# Altium PCB Control Access.PcbDoc
Units mil, origin at the board's own origin, x right, y up, seen from the top; angles counter-clockwise.
Board outline 3210.35 x 3265 mil, 2 copper layers (Top Layer, Bottom Layer); 90 components, 163 nets, 400 pads, 56 vias.
Unrouted connection lines stored in the file: 2.
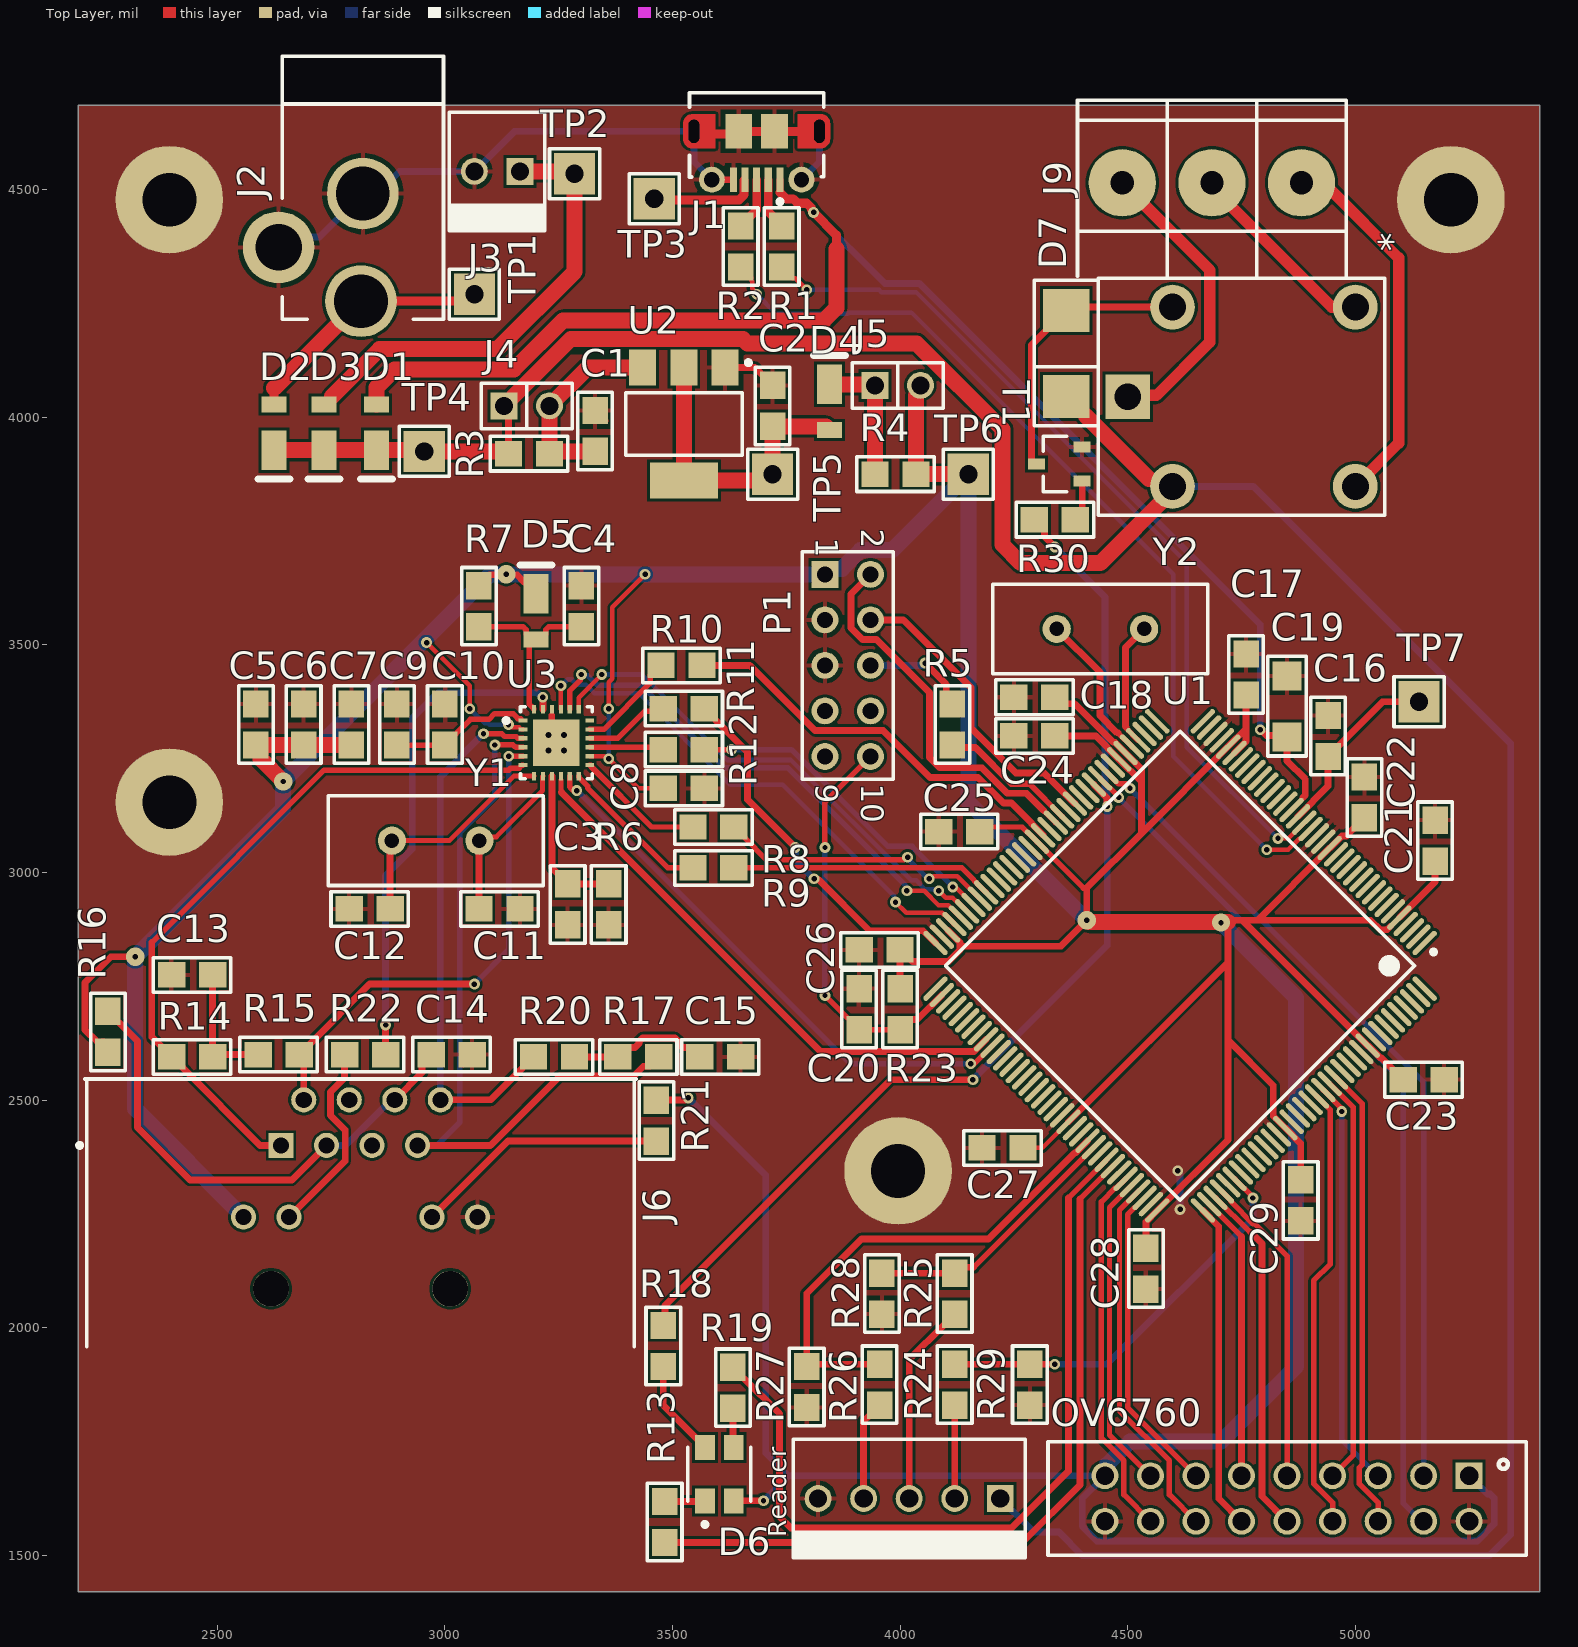
[diagram p0: Top Layer view]
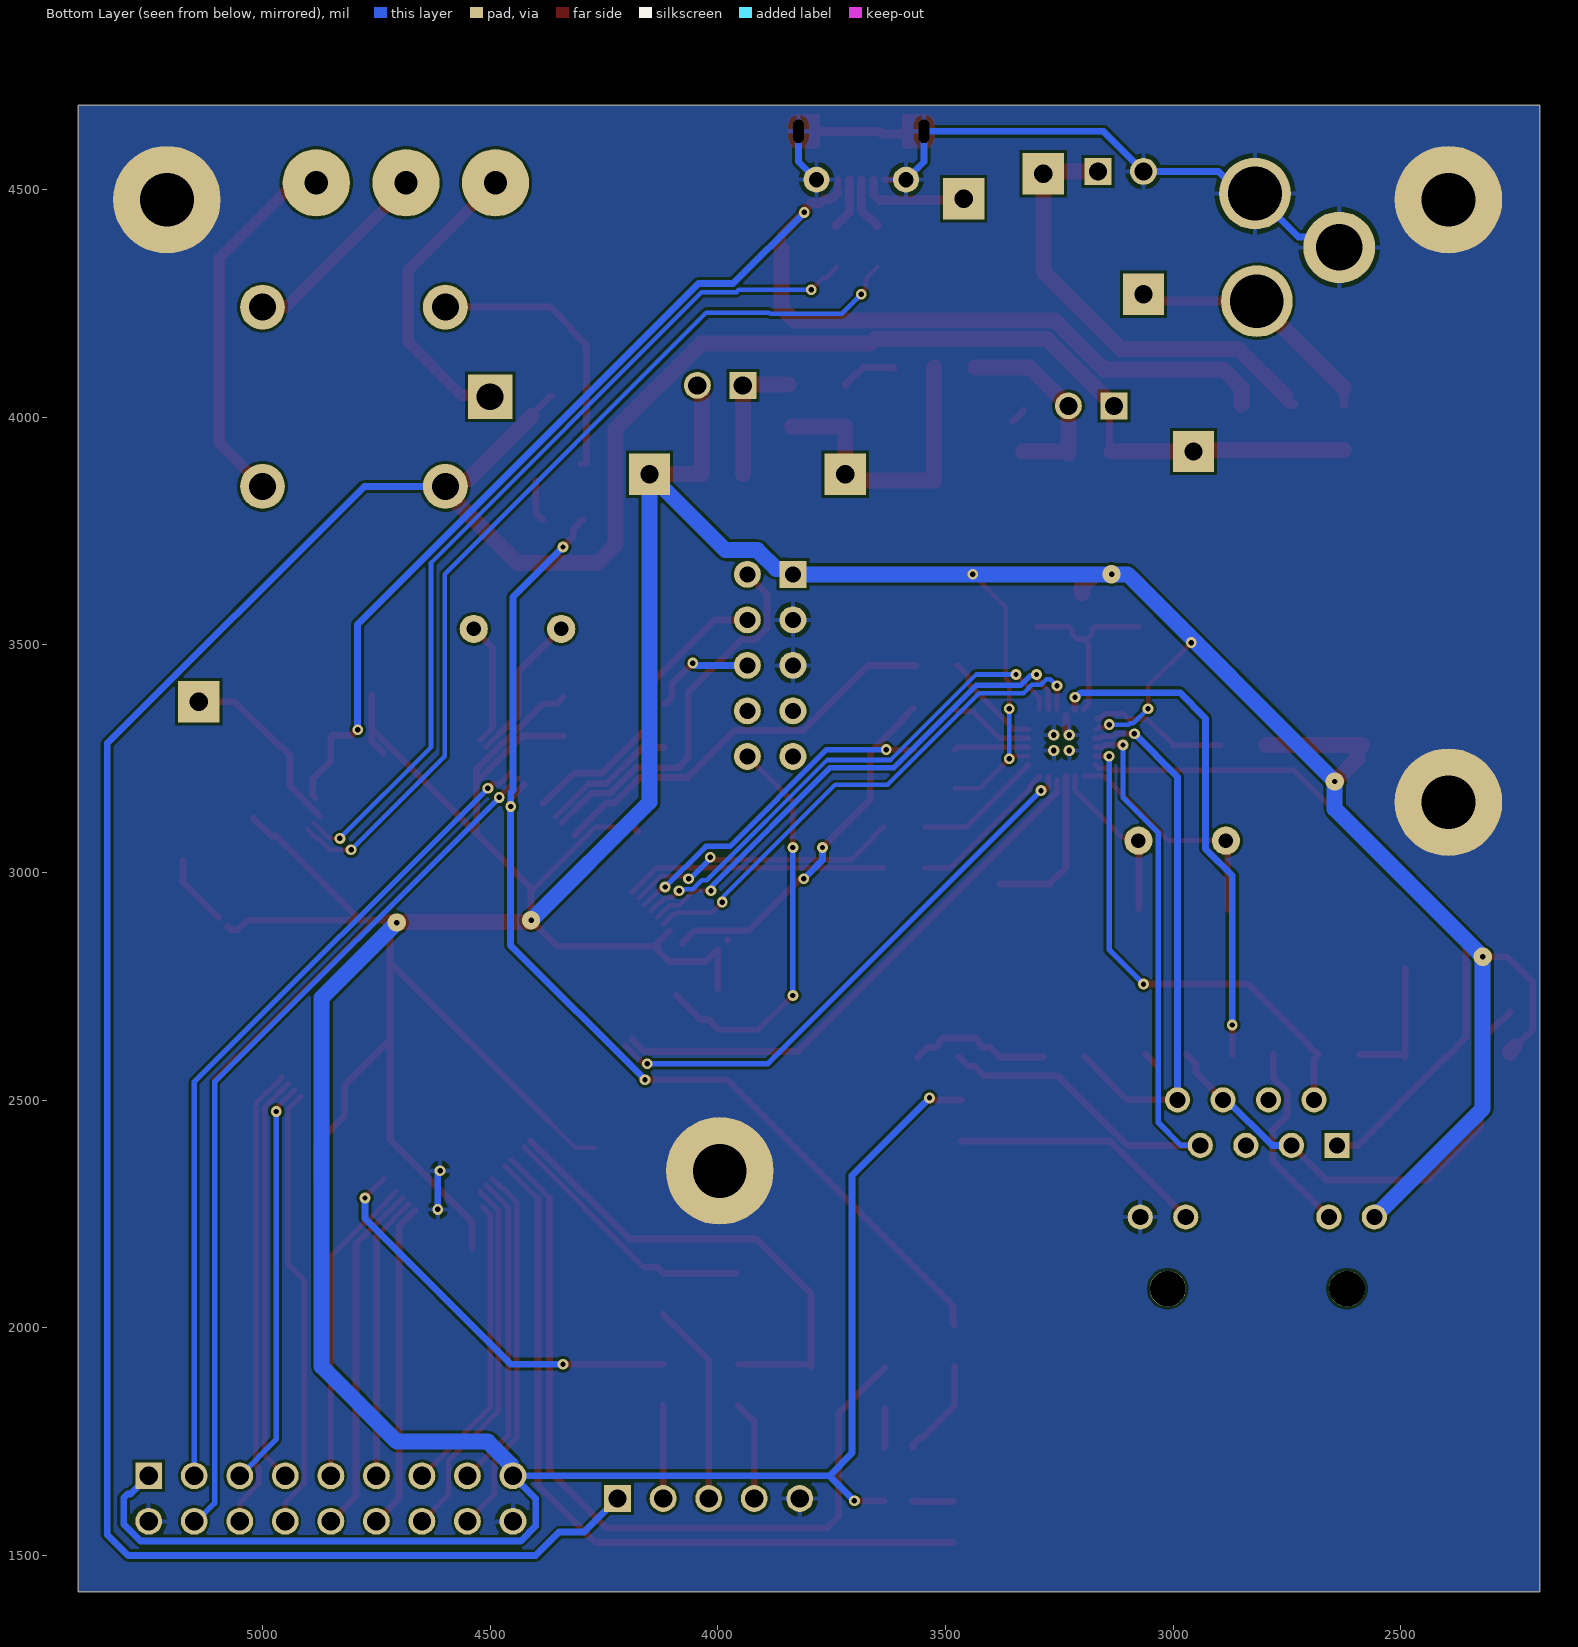
[diagram p1: Bottom Layer view, seen from below]

## Layer stack, top to bottom
Top Solder: solder mask 0.4, Solder Resist, Dk 3.5
Top Layer: signal copper 1.4
Dielectric 1: dielectric 12.6, FR-4, Dk 4.8
Bottom Layer: signal copper 1.4
Bottom Solder: solder mask 0.4, Solder Resist, Dk 3.5

## Board outline
2194.65,1420 5405,1420 5405,4685 2194.65,4685

## Design rules (kind name [scope] priority, off if disabled: settings)
Clearance [All] p1: gap=6 ignorepadtopadclearanceinfootprint=FALSE except(0: Arc-Hole Track-Hole SMDPad-Hole THPad-Hole Via-Hole Fill-Hole Poly-Hole Region-Hole Text-Hole)
HoleSize [All] p1: absolutevalues=TRUE maxlimit=1000 minlimit=3.94 maxpercent=80.000 minpercent=20.000
PolygonConnect [All] p1: connectstyle=Relief reliefconductorwidth=10 reliefentries=4 polygonreliefangle="90 Angle" airgapwidth=10
RoutingVias [All] p1: holewidth=11.81 width=23.62 viastyle="Through Hole" minholewidth=11.81 minwidth=23.62 maxholewidth=11.81 maxwidth=23.62
SolderMaskExpansion [All] p1: expansion=4 istentingtop=FALSE
Width [All] p1: maxlimit=39.37 minlimit=6 preferedwidth=6
29 further rules are at their usual default settings.

## Classes and differential pairs
net class PTE[0..28]: PTE0 PTE1 PTE2 PTE3 PTE4 PTE5 PTE6 PTE7 PTE8 PTE9 PTE10 PTE11 PTE12 PTE24 PTE25 PTE26 PTE27 PTE28
net class PTD[0..15]: PTD0 PTD1 PTD2 PTD3 PTD4 PTD5 PTD6 PTD7 PTD8 PTD9 PTD10 PTD11 PTD12 PTD13 PTD14 PTD15
net class PTC[0..19]: PTC0 PTC1 PTC2 PTC3 PTC4 PTC5 PTC6 PTC7 PTC8 PTC9 PTC10 PTC11 PTC12 PTC13 PTC14 PTC15 PTC16 PTC17 PTC18 PTC19
net class PTB[0..23]: I2S0_TX_BCLK I2S0_TX_FS PTB0 PTB1 PTB2 PTB3 PTB4 PTB5 PTB6 PTB7 PTB8 PTB9 PTB10 PTB11 PTB16 PTB17 PTB20 PTB21 PTB22 PTB23
net class PTA[0..29]: PTA0 PTA1 PTA2 PTA3 PTA4 PTA5 PTA6 PTA7 PTA8 PTA9 PTA10 PTA11 PTA12 PTA13 PTA14 PTA15 PTA16 PTA17 PTA18 PTA19 PTA24 PTA25 PTA26 PTA27 PTA28 PTA29

## Components (designator, comment, footprint, x,y, rotation, side; value= is the part's Value field where it differs from the comment)
* "RELE SIMPLE" "RELE SERIE 964" 4750,4045 r0 top
C1 "10uF" 0805 3330,3970 r90 top
C2 "10uF" 0805 3720,4025 r90 top
C3 "100pF" 0805 3270,2930 r90 top
C4 "10uF" 0805 3300,3585 r270 top
C5 "4.7uF" 0805 2585,3325 r270 top
C6 "0.1uF" 0805 2690,3325 r270 top
C7 "0.1uF" 0805 2795,3325 r270 top
C8 "0.1uF" 0805 3525,3185 r180 top
C9 "0.1uF" 0805 2895,3325 r270 top
C10 "1uF" 0805 3000,3325 r270 top
C11 "24pF" 0805 3120,2920 r180 top
C12 "24pF" 0805 2835,2920 r0 top
C13 "0.1uF" 0805 2445,2775 r0 top
C14 "10uF" 0805 3015,2600 r180 top
C15 "0.1uF" 0805 3605,2595 r180 top
C16 "0.1uF" 0805 4940,3300 r270 top
C17 "0.1uF" 0805 4760,3435 r270 top
C18 "0.1uF" 0805 4295,3385 r0 top
C19 "10uF DNP" 1206 4850,3365 r90 top
C20 "0.1uF" 0805 3910,2700 r270 top
C21 "0.1uF" 0805 5175,3070 r270 top
C22 "0.1uF" 0805 5020,3165 r270 top
C23 "0.1uF" 0805 5150,2545 r180 top
C24 "0.1uF" 0805 4295,3300 r0 top
C25 "0.1uF" 0805 4130,3090 r0 top
C26 "0.1uF" 0805 3955,2830 r0 top
C27 "0.1uF" 0805 4225,2395 r0 top
C28 "0.1uF" 0805 4540,2130 r90 top
C29 "0.1uF" 0805 4880,2280 r90 top
D1 "DFLS130L-7" DIOD-POWERDI123-2_A_V 2850,3965 r270 top
D2 "DFLS130L-7" DIOD-POWERDI123-2_A_V 2625,3965 r270 top
D3 "DFLS130L-7" DIOD-POWERDI123-2_A_V 2735,3965 r270 top
D4 "DFLS130L-7" DIOD-POWERDI123-2_A_V 3845,4035 r90 top
D5 "DFLS130L-7" DIOD-POWERDI123-2_A_V 3200,3575 r90 top
D6 "CLV1A-FKB-CHMKPEHBB7A363" FP-CLV1A-FKB-CHMKPEHBB7A3-MFG 3602.93,1678.35 r90 top
D7 "1N4007" SMAK 4365,4235 r270 top
J1 "105017-0001" USB-MICRO-B_V 3685,4575 r180 top
J2 "JACKDC" JACKDC 2820,4255 r90 top
J3 "MOLEX2" MOLEX2 3165,4540 r180 top
J4 "CON2" SIP2 3180,4025 r0 top
J5 "CON2" SIP2 3995,4070 r0 top
J6 "MRJ-5381-01" FP-MRJ-5381-01-MFG 2815,2010 r0 top
J9 "BORNERA 3" BORNERA3 4685,4515 r270 top
OV6760 "CON9*2" SIP9*2 5250,1675 r180 top (schematic designator J8)
P1 "Header 5X2" HDR2X5 3835,3655 r270 top
R1 "33" 0805 3740,4375 r270 top
R2 "33" 0805 3650,4375 r270 top
R3 "0" 0805 3185,3920 r0 top
R4 "0" 0805 3990,3875 r0 top
R5 "0" 0805 4115,3325 r270 top
R6 "6.49K" 0805 3360,2930 r90 top
R7 "10K" 0805 3075,3585 r270 top
R8 "33" 0805 3590,3100 r180 top
R9 "33" 0805 3590,3010 r180 top
R10 "33" 0805 3520,3455 r180 top
R11 "33" 0805 3525,3360 r180 top
R12 "33" 0805 3525,3270 r0 top
R13 "430" 0805 3482.93,1573.35 r90 top
R14 "49.9" 0805 2445,2595 r180 top
R15 "49.9" 0805 2635,2600 r0 top
R16 "0" 0805 2260,2650 r270 top
R17 "49.9" 0805 3425,2595 r0 top
R18 "270" 0805 3480,1960 r90 top
R19 "270" 0805 3632.93,1868.35 r90 top
R20 "49.9" 0805 3240,2595 r180 top
R21 "100" 0805 3465,2455 r270 top
R22 "100" 0805 2825,2600 r180 top
R23 "10K" 0805 4000,2700 r90 top
R24 "3.3K" 0805 4120,1875 r270 top
R25 "3.3K" 0805 4120,2075 r270 top
R26 "3.3K" 0805 3955,1875 r270 top
R27 "6.8K" 0805 3795,1870 r90 top
R28 "6.8K" 0805 3960,2075 r90 top
R29 "6.8K" 0805 4285,1875 r90 top
R30 "1K" 0805 4340,3775 r180 top
Reader "MOLEX5" MOLEX5 4220,1625 r180 top (schematic designator J7)
T1 "BC337" SOT23 4400,3860 r90 top
TP1 "TP" TPTH 3065,4270 r0 top
TP2 "TP" TPTH 3285,4535 r0 top
TP3 "TP" TPTH 3460,4480 r0 top
TP4 "TP" TPTH 2955,3925 r0 top
TP5 "TP" TPTH 3720,3875 r0 top
TP6 "TP" TPTH 4150,3875 r0 top
TP7 "TP" TPTH 5140,3375 r0 top
U1 "MK64FN1M0VLQ12" 918-03_N 4615,2795 r225 top
U2 "NCP1117ST33T3G" ONSC-SOT-223-4-318H-01_A_V 3525,3985 r270 top
U3 "KSZ8081RNACA" FP-QFN44-24LD-PL-1-MFG 3245,3285 r0 top
Y1 "25MHZ" "CRISTAL PERFIL" 2980,3070 r0 top
Y2 "32.768KHZ" "CRISTAL PERFIL" 4440,3535 r180 top

## Footprints (in the part's own frame and the unit in brackets; to place one, negate y for a bottom-side part, rotate by r counter-clockwise, add the part's x,y. Pads: shape width x height; smd on the part's side, far side on the other; paste and mask are expansions set on the pad)
0805 [mil] "Pasivo 0805"
  rect 60x56 smd: 1(-45,0) 2(45,0)
  silkscreen extent -85,-38 85,38, body extent -40,-25 39,25, height 15
918-03_N [mm] "Thin QFP, 144-Leads, Body 20x20mm, Pitch 0.5mm, IPC Medium Density"
  oval 1.8x0.3 smd: 1(-10.55,8.75) 2(-10.55,8.25) 3(-10.55,7.75) 4(-10.55,7.25) 5(-10.55,6.75) 6(-10.55,6.25) 7(-10.55,5.75) 8(-10.55,5.25) 9(-10.55,4.75) 10(-10.55,4.25) 11(-10.55,3.75) 12(-10.55,3.25) 13(-10.55,2.75) 14(-10.55,2.25) 15(-10.55,1.75) 16(-10.55,1.25) 17(-10.55,0.75) 18(-10.55,0.25) 19(-10.55,-0.25) 20(-10.55,-0.75) 21(-10.55,-1.25) 22(-10.55,-1.75) 23(-10.55,-2.25) 24(-10.55,-2.75) 25(-10.55,-3.25) 26(-10.55,-3.75) 27(-10.55,-4.25) 28(-10.55,-4.75) 29(-10.55,-5.25) 30(-10.55,-5.75) 31(-10.55,-6.25) 32(-10.55,-6.75) 33(-10.55,-7.25) 34(-10.55,-7.75) 35(-10.55,-8.25) 36(-10.55,-8.75) 73(10.55,-8.75) 74(10.55,-8.25) 75(10.55,-7.75) 76(10.55,-7.25) 77(10.55,-6.75) 78(10.55,-6.25) 79(10.55,-5.75) 80(10.55,-5.25) 81(10.55,-4.75) 82(10.55,-4.25) 83(10.55,-3.75) 84(10.55,-3.25) 85(10.55,-2.75) 86(10.55,-2.25) 87(10.55,-1.75) 88(10.55,-1.25) 89(10.55,-0.75) 90(10.55,-0.25) 91(10.55,0.25) 92(10.55,0.75) 93(10.55,1.25) 94(10.55,1.75) 95(10.55,2.25) 96(10.55,2.75) 97(10.55,3.25) 98(10.55,3.75) 99(10.55,4.25) 100(10.55,4.75) 101(10.55,5.25) 102(10.55,5.75) 103(10.55,6.25) 104(10.55,6.75) 105(10.55,7.25) 106(10.55,7.75) 107(10.55,8.25) 108(10.55,8.75)
  oval 0.3x1.8 smd: 37(-8.75,-10.55) 38(-8.25,-10.55) 39(-7.75,-10.55) 40(-7.25,-10.55) 41(-6.75,-10.55) 42(-6.25,-10.55) 43(-5.75,-10.55) 44(-5.25,-10.55) 45(-4.75,-10.55) 46(-4.25,-10.55) 47(-3.75,-10.55) 48(-3.25,-10.55) 49(-2.75,-10.55) 50(-2.25,-10.55) 51(-1.75,-10.55) 52(-1.25,-10.55) 53(-0.75,-10.55) 54(-0.25,-10.55) 55(0.25,-10.55) 56(0.75,-10.55) 57(1.25,-10.55) 58(1.75,-10.55) 59(2.25,-10.55) 60(2.75,-10.55) 61(3.25,-10.55) 62(3.75,-10.55) 63(4.25,-10.55) 64(4.75,-10.55) 65(5.25,-10.55) 66(5.75,-10.55) 67(6.25,-10.55) 68(6.75,-10.55) 69(7.25,-10.55) 70(7.75,-10.55) 71(8.25,-10.55) 72(8.75,-10.55) 109(8.75,10.55) 110(8.25,10.55) 111(7.75,10.55) 112(7.25,10.55) 113(6.75,10.55) 114(6.25,10.55) 115(5.75,10.55) 116(5.25,10.55) 117(4.75,10.55) 118(4.25,10.55) 119(3.75,10.55) 120(3.25,10.55) 121(2.75,10.55) 122(2.25,10.55) 123(1.75,10.55) 124(1.25,10.55) 125(0.75,10.55) 126(0.25,10.55) 127(-0.25,10.55) 128(-0.75,10.55) 129(-1.25,10.55) 130(-1.75,10.55) 131(-2.25,10.55) 132(-2.75,10.55) 133(-3.25,10.55) 134(-3.75,10.55) 135(-4.25,10.55) 136(-4.75,10.55) 137(-5.25,10.55) 138(-5.75,10.55) 139(-6.25,10.55) 140(-6.75,10.55) 141(-7.25,10.55) 142(-7.75,10.55) 143(-8.25,10.55) 144(-8.75,10.55)
  silkscreen extent -10.67,-9.25 9.25,9.57, body extent -10,-10 10,10, height 1.6
1206 [mil] "Pasivo 1206"
  rect 64x64 smd: 1(-67,0) 2(67,0)
  silkscreen extent -109,-42 110,42, body extent -62,-32 63,31, height 20
BORNERA3 [mm] "Bornera con Tornillos 5mm separación"
  round 3.75 hole 1.3: 1(0,5) 2(0,0) 3(0,-5)
  silkscreen extent -4.6,-7.5 5.2,7.5, body extent -3.76,-7.39 3.94,8.11, height 10.05
"CRISTAL PERFIL" [mil]
  round 62 hole 32: 1(-96.06,0) 2(96.06,0)
  silkscreen extent -236,-98 236,98, body extent -223,-91 223,92, height 138
DIOD-POWERDI123-2_A_V [mm] "SOD, 2-Leads, Body 2.8x1.78mm"
  rect 0.9x1.4 smd: 1(-1.6,0)
  rect 2.2x1.4 smd: 2(0.95,0)
  silkscreen extent 2.55,-0.89 2.55,0.89, body extent -1.4,-0.89 1.4,0.89, height 1.01
FP-CLV1A-FKB-CHMKPEHBB7A3-MFG [mm]
  rect 1.4x1.1 smd paste+0 mask+0: 1(-1.5,0.8) 2(-1.5,-0.8) 3(1.5,-0.8) 4(1.5,0.8)
  silkscreen extent -2.92,-1.75 1.5,1.75
FP-MRJ-5381-01-MFG [mm]
  rect 1.4x1.4 hole 0.9 paste-1000 mask+0: 1(-4.44,9.925)
  round 1.4 hole 0.9 paste-1000 mask+0: 2(-3.17,12.465) 3(-1.9,9.925) 4(-0.63,12.465) 5(0.64,9.925) 6(1.91,12.465) 7(3.18,9.925) 8(4.45,12.465) 9(6.53,5.925) 10(3.99,5.925) 11(-3.99,5.925) 12(-6.53,5.925)
  round 2 hole 2 unplated paste-1000 mask+0: ""(-5,1.925) ""(5,1.925)
  silkscreen extent -15.8,-1.3 15.38,13.62, body extent -15.38,-13.72 15.38,13.72, height 0.25
FP-QFN44-24LD-PL-1-MFG [mm]
  rect 0.48x0.23 smd paste+0 mask+0: 1(-1.86,1.25) 2(-1.86,0.75) 3(-1.86,0.25) 4(-1.86,-0.25) 5(-1.86,-0.75) 6(-1.86,-1.25) 13(1.86,-1.25) 14(1.86,-0.75) 15(1.86,-0.25) 16(1.86,0.25) 17(1.86,0.75) 18(1.86,1.25)
  rect 0.23x0.48 smd paste+0 mask+0: 7(-1.25,-1.86) 8(-0.75,-1.86) 9(-0.25,-1.86) 10(0.25,-1.86) 11(0.75,-1.86) 12(1.25,-1.86) 19(1.25,1.86) 20(0.75,1.86) 21(0.25,1.86) 22(-0.25,1.86) 23(-0.75,1.86) 24(-1.25,1.86)
  rect 2.6x2.6 smd paste-1000 mask+0: 25(0,0)
  silkscreen extent -2.92,-2 2,2, body extent -2.2,-2.2 2.2,2.2, height 0.25
HDR2X5 [mm] "Connector; Header; 5x2 Position"
  rect 1.5x1.5 hole 0.9: 1(0,0)
  round 1.5 hole 0.9: 2(0,2.54) 3(2.54,0) 4(2.54,2.54) 5(5.08,0) 6(5.08,2.54) 7(7.62,0) 8(7.62,2.54) 9(10.16,0) 10(10.16,2.54)
  silkscreen extent -1.27,-1.27 11.43,3.81
JACKDC [mm]
  round 4 hole 3: 1(0,0.102) 2(6,0)
  round 4 hole 2.6: 3(3,4.7)
  silkscreen extent -1,-4.5 13.67,4.5, body extent -0.16,-4.5 13.67,5.01, height 11
MOLEX2 [mm]
  rect 1.5x1.5 hole 1.016: 1(0,0)
  round 1.5 hole 1.016: 2(2.54,0)
  silkscreen extent -1.4,-3.3 3.94,3.3, body extent -1.27,-3.17 3.81,3.18, height 10.74
MOLEX5 [mm]
  rect 1.5x1.5 hole 1.016: 1(0,0)
  round 1.5 hole 1.016: 2(2.54,0) 3(5.08,0) 4(7.62,0) 5(10.16,0)
  silkscreen extent -1.4,-3.3 11.56,3.3, body extent -1.27,-3.17 11.43,3.18, height 10.74
ONSC-SOT-223-4-318H-01_A_V [mm] "SOT223, 4-Leads, Body 6.5x3.5mm, Pitch 2.3mm"
  rect 2x1.5 smd: 1(-3.15,2.3) 2(-3.15,0) 3(-3.15,-2.3)
  rect 2x3.8 smd: 4(3.15,0)
  silkscreen extent -3.55,-3.25 1.75,3.73, body extent -1.75,-3.25 1.75,3.25, height 1.8
"RELE SERIE 964" [mm]
  round 2.5 hole 1.5: B1(-3.85,-5) B2(-3.85,5) NA1(6.35,-5) NC1(6.35,5)
  rect 2.5x2.5 hole 1.5: C1(-6.35,0)
  silkscreen extent -7.99,-6.6 7.99,6.6, body extent -7.85,-6.1 7.85,6.2, height 13.66
SIP2 [mm]
  rect 1.5x1.5 hole 1.016: 1(-1.27,0)
  round 1.5 hole 1.016: 2(1.27,0)
  silkscreen extent -2.54,-1.27 2.54,1.27
SIP9*2 [mm]
  rect 1.5x1.5 hole 1.016: 1(0,0)
  round 1.5 hole 1.016: 2(0,2.54) 3(2.54,0) 4(2.54,2.54) 5(5.08,0) 6(5.08,2.54) 7(7.62,0) 8(7.62,2.54) 9(10.16,0) 10(10.16,2.54) 11(12.7,0) 12(12.7,2.54) 13(15.24,0) 14(15.24,2.54) 15(17.78,0) 16(17.78,2.54) 17(20.32,0) 18(20.32,2.54)
  silkscreen extent -3.18,-1.91 23.49,4.45, body extent -1.26,-1.3 21.6,3.78, height 10.1
SMAK [mm]
  rect 2.4x2.6 smd: 1(0,0) 2(4.8,0)
  silkscreen extent -1.68,-1.78 6.45,1.78, body extent -0.19,-1.3 5.01,1.3, height 2.4
SOT23 [mm]
  rect 0.6x0.95 smd: 1(0,0) 2(0.95,2.55) 3(1.9,0)
  silkscreen extent -0.6,0.87 2.5,2.17, body extent -0.53,-0.25 2.47,2.88, height 1
TPTH [mm]
  rect 2.3x2.3 hole 1.016: 1(0,0)
  silkscreen extent -1.4,-1.4 1.4,1.4, body extent -1.27,-1.27 1.27,1.27, height 6.04
USB-MICRO-B_V [mm] "USB, MICRO B, Body 7.491x4.695 mm, Pitch 0.65 mm"
  rect 0.4x1.35 smd: 1(-1.3,1.35) 2(-0.65,1.35) 3(0,1.35) 4(0.65,1.35) 5(1.3,1.35)
  round 1.45 hole 0.85: 6(-2.5,1.35) 7(2.5,1.35)
  rrect50% 0x0 hole 0.6 slot 1.3 at 90 deg: 8(-3.5,-1.35) 11(3.5,-1.35)
  rect 1.5x1.9 smd: 9(-1,-1.35) 10(1,-1.35)
  Top Layer circle w0.5: c-3.6,-1.8 r0.25
  Top Layer circle w0.5: c3.6,-1.8 r0.25
  Top Layer circle w0.5: c3.6,-0.9 r0.25
  Top Layer region: -3.6,-1.8 -3.6,-0.9 -4.1,-0.9 -4.1,-1.8
  Top Layer region: 3.6,-0.9 3.6,-1.8 4.1,-1.8 4.1,-0.9
  Top Layer region: 2.3,-0.4 2.3,-2.3 3.6,-2.3 3.6,-0.4
  Top Layer region: -2.3,-2.3 -2.3,-0.4 -3.6,-0.4 -3.6,-2.3
  Top Layer lines w0.5: -3.5,-0.671 cw(c-3.6,-0.9) -3.5,-1.129 cw(c-3.6,-0.9) -3.85,-0.9 cw(c-3.6,-0.9) -3.5,-0.671
  silkscreen extent -3.75,-3.5 3.75,2.7, body extent -4.1,-3.9 4.1,1.5, height 2.67

## Part data
C1 C2 C3 C4 C5 C6 C7 C8 C9 C10 C11 C12 C13 C14 C15 C16 C17 C18 C19 C20 C21 C22 C23 C24 C25 C26 C27 C28 C29: library part CAP
D1 D2 D3 D4 D5: library part CMP-2000-07448-1, "Schottky Barrier Rectifier, 30 V, 1 A, -40 to 125 degC, 2-Pin SMD, RoHS, Tape and Reel", Average Rectified Current=1A, Capacitance=76pF, Case\/Package=SMD/SMT, Forward Voltage=360mV, Manufacturer="Diodes Inc", Max Forward Surge Current (Ifsm)=50A, Max Operating Temperature=125degC, Max Power Dissipation=1.67W, Max Repetitive Reverse Voltage (Vrrm)=30V, Min Operating Temperature=-40degC, Package Description="2-Pin Small Outline Diode, Body 2.8 x 1.78 mm", Package Quantity=3000, Package Reference=POWERDI123-2_A, Peak Reverse Current=1mA, Contact Plating=Matte, Current Rating=1A, Datasheet URL=https://www.diodes.com/assets/Datasheets/ds30492.pdf, Datasheet Version="Rev. 4-2, 06/2009", Element Configuration=Single, Forward Current=1A, Height=0.98mm, Lead Free=LeadFree, Length=2.8mm, Manufacturer URL=http://www.diodes.com/, Mount=SurfaceMount, Mounting Technology=SurfaceMount, Number of Pins=2, Output Current=1A, Packaging=TapeandReel, Peak Non-Repetitive Surge Current=50A, Polarity=Standard, Radiation Hardening=No, REACH SVHC=NoSVHC, Reverse Voltage (DC)=30V, RoHSCompliant=true, Termination=SMD/SMT, Voltage Rating (DC)=30V, Width=1.78mm
D6: library part CMP-13977-000017-1, "LED RGB 4PLCC SMD", Case/Package=PLCC, Color=Blue, Forward Current=20mA, Forward Voltage=3.2V, Lens Color=White, Max Operating Temperature=100°C, Min Operating Temperature=-40°C, Package Quantity=2000, Reverse Voltage=5V, Depth=3.2mm, Dominant Wavelength=470nm, Height=2.1mm, Length=2.8mm, Lens Style=Round, Lens Transparency=Diffused, Luminous Intensity=315mcd, Mount="Surface Mount", Number of Elements=3, Number of LEDs=1, Number of Pins=4, Packaging="Tape and Reel", Radiation Hardening=No, Test Current=20mA, Viewing Angle=120°, Width=2.8mm
D7: library part DIODO
J1: library part CMP-2000-05827-1, "Micro-USB B Receptacle, Right Angle, Bottom Mount, Surface Mount, with Solder Tabs, -30 to 85 degC, 5-Pin USB, RoHS, Tape and Reel", Manufacturer=Molex, Package Description="5-Leads USB, Micro B, Body 7.5 x 5 mm, Pitch 0.65 mm", Package Reference=MICRO-B, Package Version="Rev. F, 12/2012", Standard Package=1, Voltage - Max=30V, 3D Model=105017-0001.stp, Catalog Drawings=1050170001, Category=Connectors,Interconnects, Circuits=5, Connector Type=USB-microB, Datasheet URL=http://www.molex.com/elqNow/elqRedir.htm?ref=http://www.molex.com/webdocs/datasheets/pdf/en-us/1050170001_IO_CONNECTORS.pdf, Datasheet Version=03/2016, Family=USB,DVI,HDMIConnectors, Featured Product=Micro-USBConnectorsUSBConnectors, Features=Shielded,SolderRetention, Gender=Receptacle, Ingress Protection=-, Manufacturer URL=http://www.molex.com/, Mating Products=WM17145-ND-CABLEMICROUSBBTOSTDA1.0MWM17147-ND-CABLEMICROUSBBTOSTDA2.0MWM17146-ND-CABLEMICROUSBBTOSTDA1.5M, Mounting Technology=SurfaceMount, Mounting Type=BoardCutout,SurfaceMount,RightAngle, Number of Contacts=5, Online Catalog=Molex-MicroUSB, Other Names=WM1399DKR, Package URL=http://www.molex.com/pdm_docs/sd/1050170001_sd.pdf, Packaging=Digi-Reel®, PCN Assembly/Origin=ResinSupplier21/Oct/2015, RoHS Information=1050170001CertofCompliance, Series=-, Specifications=-
J6: library part CMP-2000-06754-2, "CONN MOD JACK 8P8C R/A UNSHLD", Color=Black, Contact Resistance=30mR, Current Rating=1.5A, Flammability Rating="UL94 V-0", Max Operating Temperature=105°C, Min Operating Temperature=-40°C, Package Quantity=40, Ratings=IP67, Voltage Rating=100V, Connector Type=Jack, Contact Material=Bronze, Contact Plating=Gold, Depth=26.95mm, Direction=Down, Gender=Female, Housing Color=Black, Housing Material=PC, Lead Free="Lead Free", Length=30.3mm, Max Current Rating=1.5A, Mount="Through Hole", Number of Contacts=8, Number of Ports=1, Number of Positions=8, Number of Positions Loaded=8, Number of Rows=1, Orientation="Right Angle", Packaging=Bulk, Pitch=2.54mm, Primary Type=MODULAR, Radiation Hardening=No, RoHS Compliant=Yes, Series=MRJ, Shielding=Unshielded, Termination="Through Hole", Voltage Rating (DC)=100V
P1: "Header, 5-Pin, Dual row", LatestRevisionDate=17-Jul-2002, LatestRevisionNote="Re-released for DXP Platform.", Publisher="Altium Limited"
R1 R2 R3 R4 R5 R6 R7 R8 R9 R10 R11 R12 R13 R14 R15 R16 R17 R18 R19 R20 R21 R22 R23 R24 R25 R26 R27 R28 R29 R30: library part RES
T1: library part "TRANSISTOR NPN"
U1: library part CMP-0182-00046-1, "Cortex-M4-based Microcontroller with FPU, 1 MB, 120 MHz, 1.71 to 3.6 V, -40 to 105 degC, 144-Pin QFP (918-03), RoHS, Tray", Manufacturer="Freescale Semiconductor", Temperature Range="-40 to 105 degC", ComponentLink1Description="Manufacturer URL", ComponentLink1URL=http://www.freescale.com/, ComponentLink2Description=Datasheet, ComponentLink2URL=http://cache.freescale.com/files/microcontrollers/doc/data_sheet/K64P144M120SF5.pdf?pspll=1, ComponentLink3Description="Package Specification", ComponentLink3URL=http://cache.freescale.com/files/shared/doc/package_info/98ASS23177W.pdf, DatasheetVersion="Rev. 3", Flash="1 MB", Mounting Technology="Surface Mount", PackageDescription="144-Pin Plastic Quad Flat Package, Body 20 x 20 mm, Pitch 0.5 mm", PackageVersion="Rev. G", Packing=Tray, PartNumber=MK64FN1M0VLQ12, RoHS=TRUE, SRAM="256 KB", VBAT="1.71 to 3.6 V", VDD="1.71 to 3.6 V", VDDA="1.71 to 3.6 V"
U2: library part CMP-1679-00010-1, "Low-Dropout Positive Fixed Voltage Regulator, 1 A, 3.3 V Output Voltage, 0 to 125 degC, 4-Pin SOT-223 (318H-01), Pb-Free, Tape and Reel", Case Code (Imperial)=0603, Case Code (Metric)=1608, Max Operating Temperature="155 degC", Min Operating Temperature="-55 degC", Package Quantity=5000, Power Rating="100 mW", Resistance="220 kohm", Tolerance=1%, Type (Resistor)="Thick Film", Voltage Rating="75 V", Case\Package=0603, ComponentLink1Description="Manufacturer URL", ComponentLink1URL=http://www.onsemi.com/, ComponentLink2Description=Datasheet, ComponentLink2URL=http://www.onsemi.com/pub_link/Collateral/NCP1117-D.PDF, DatasheetVersion="Rev. 27, 09/2014", Height="0.45 mm", Length="1.55 mm", Mount="Surface Mount", PackageDescription="4-Pin Small Outline Transistor, Body 6.5 x 3.5 mm, Pitch 2.3 mm", PackageReference=SOT-223-4-318H-01_A, Packaging="Tape and Reel", Radiation Hardening=No, REACH SVHC=Unknown, RoHSCompliant=true, Weight="7.1E-05 oz", Width="0.85 mm"
U3: library part CMP-06281-000014-1, "IC TRANSCEIVER FULL 1/1 24QFN", Ambient Temperature Range High=+70°C, Ambient Temperature Range Low=0°C, Manufacturer=Microchip, Max Junction Temp=+125°C, Max Supply Voltage=3.465V, Min Supply Voltage=1.71V, Nominal Supply Current=20-47mA, Package=QFN44-24LD-PL-1, Temperature="to +125°C", Automotive=No, Category=IC, ComponentLink2Description=Datasheet, ComponentLink2URL=http://ww1.microchip.com/downloads/en/DeviceDoc/KSZ8081RNA-RND-10BASE-T-100BASE-TX-PHY-with-RMII-Support-DS00002199B.pdf, Data Rate=100Mbits/s, Device Class L1="Integrated Circuits (ICs)", Device Class L2="Interface ICs", Device Class L3="Ethernet Interface ICs", Digikey Description="IC TRANSCEIVER FULL 1/1 24QFN", Height=0.9mm, Interface=Ethernet,Other, Lead Free=Yes, Manufacturer Part Number=KSZ8081RNACA, Number Of Channels=1, Octopart=https://octopart.com/ksz8081rnaca-microchip-66799959, RoHS=TRUE, Simplex Duplex="Full Duplex", Standoff Height=0.02mm, Temperature Range High=+125°C
Y1 Y2: library part CRISTAL

## Free pads (board coordinates)
  round 236.22 hole 118.11: 0(2395.13,3154.57) 0(2395.13,4477.93) 0(3995.58,2344.57) 0(5210,4477.93)

## Via types
v1: diameter 23.62, hole 11.81, Top Layer to Bottom Layer, 47 vias
v2: diameter 40, hole 11.81, Top Layer to Bottom Layer, 5 vias
v3: diameter 24.61, hole 12.8, Top Layer to Bottom Layer, 4 vias

## Nets (pads, with @x,y where several pads share a name; then routed paths per layer and width w, separated by ;. In a path a pad name is that pad's centre, name@x,y a point inside that pad or via, vN(x,y) a via of type N, cw(c..) or ccw(c..) an arc to the next point about the centre after c; other vN are vias at no path point)
3V3: C5.2 C6.2 C7.2 C8.2 C17.2 C18.2 C21.2 C22.2 C23.2 C24.2 C25.2 C26.2 C27.2 C28.2 C29.2 D5.2 D6.2 J5.2 J6.12 OV6760.1 OV6760.17 P1.1 R4.2 R7.1 R16.2 R21.1 R23.2 TP6.1 U1.5 U1.16 U1.31 U1.32 U1.42 U1.43 U1.56 U1.70 U1.94 U1.108 U1.122 U1.135 U3.2 U3.14 | length 16336.5
  Top Layer w10: v1(2960,3505) 3055,3410 v1(3055,3360) ; v1(3140,3325) 3146.31,3318.69 3160.99,3318.69 3163.64,3318.68 3167.8,3314.53 U3.2 ; U3.14 3350.84,3255.47 3356.31,3250 v1(3360,3250) 3425,3185 C8.2 ; v1(3360,3360) 3360,3417.74 3367.81,3425.55 3367.81,3582.81 v1(3440,3655) ; C27.2 4312.44,2395 U1.94
  Top Layer w12: C25.2@4185,3100 4268.24,3100 U1.56 4402.42,2965.82 4410,2965.82
  Top Layer w15: R16.2@2249.5,2617.5 2247.5,2617.5 2223.5,2641.5 2222.27,2641.5 2210,2653.77 2210,2758.65 2266.35,2815 v2(2320,2815) ; R7.1@3085.5,3642.5 3087.5,3642.5 3099.04,3654.04 v2@3134.04,3654.04 ; 3158.36,3654.04 3174.19,3638.21 D5.2@3189.94,3638.21 ; R21.1 3527.67,2500 3532.67,2505 v1(3535,2505) ; D6.2 3635.13,1620 v1(3700,1620) ; C26.2@3978.86,2850.5 C26.2@3978.86,2851.14 ; R23.2 C26.2 4002,2830 4027.17,2804.83 4106.63,2804.83 4131.91,2830.11 4131.91,2838.15 ; J5.2@4035,4048.08 4045,4058.08 J5.2 ; U1.70 4105.55,2872.55 4131.91,2846.19 4131.91,2838.15 ; C25.2 C25.2@4185,3100 ; C24.2 4430.15,3300 U1.43 4481.37,3248.38 4530.31,3199.44 ; C18.2 4354.45,3370.55 4383.71,3370.55 4468.28,3285.98 4472,3285.98 U1.42 4530.31,3227.67 4530.31,3199.44 ; U1.94 4720,2802.56 ; C28.2 4540,2232.82 U1.108 4720,2412.82 4720,2631.77 ; v2@4720,2891.04 4720,2802.56 ; v2@4720,2895 4751.63,2895 ; U1.31 4760,3287.99 4760,3315.82 ; C17.2 4760,3315.82 ; C29.2 4880,2405.12 4846.46,2438.66 U1.122 4846.06,2439.06 4819.7,2465.42 4819.7,2532.07 4720,2631.77 ; C22.2 5020,3118 4999.5,3097.5 4997.5,3097.5 4980.27,3080.27 4970.26,3080.27 4943.89,3053.9 U1.16 4784.6,2895 ; U1.5@5076.66,2881.23 5069.85,2874.42 5053.78,2874.42 5033.2,2895 4784.6,2895 ; U1.5 5175,2979.18 C21.2 ; C23.2 5103,2545 5082.5,2565.5 5082.5,2567.5 5056.75,2593.25 5053.78,2593.25 5027.41,2619.62 U1.135 4751.63,2895 ; 4131.91,2838.15 4353.15,2838.15 v2(4410,2895) 4410,2965.82 4530.31,3086.14 ; 4530.31,3086.14 4530.31,3199.44 ; 4530.31,3086.14 U1.32 4760,3315.82 ; 4720,2631.77 4720,2802.56 ; 4751.63,2895 4784.6,2895
  Top Layer w35: R16.2@2249.5,2617.5 2260,2607 R16.2 ; v2(2645,3200) 2595.5,3249.5 2595.5,3269.5 C5.2 C6.2 C7.2 ; R7.1 3075,3632 R7.1@3085.5,3642.5 ; v2@3134.04,3654.04 v2(3135,3655) ; D5.2@3189.94,3638.21 3200,3628.15 D5.2 ; J5.2@4035,4048.08 R4.2 TP6.1 ; v2(4410,2895) 4411.35,2895 4415.32,2891.04 v2@4720,2891.04
  Bottom Layer w10: v1(3055,3360) 3087.19,3327.81 3094.45,3327.81 3097.26,3325 v1(3140,3325) ; v1(3360,3250) v1(3360,3360)
  Bottom Layer w15: v1(3535,2505) 3705,2335 3705,1725 3755,1675 ; v1(3700,1620) 3755,1675 ; OV6760.1 5290,1635 5296.21,1635 5305,1626.21 5305,1569.15 5267.82,1531.97 4432.18,1531.97 4400,1564.15 4400,1625 OV6760.17 3755,1675
  Bottom Layer w35: J6.12 2320,2481.18 v2(2320,2815) 2645,3140 v2(2645,3200) 3100,3655 v2(3135,3655) v1(3440,3655) P1.1 3847.03,3667.03 3872.04,3667.03 3913.04,3708.03 3983.03,3708.03 TP6.1 4150,3155 v2(4410,2895) ; OV6760.17@4454.6,1699.6 4505,1750 4705,1750 4870,1915 4870,2725 v2(4705,2890)
5V_IN: *.B1 D1.2 D2.2 D3.2 D7.2 J4.1 R3.1 Reader.1 TP4.1 | length 6808.1
  Top Layer w15: TP4.1@2952.4,3927.6 TP4.1 ; J4.1 3140,4015 R3.1 R3.1@3135,3925 ; D7.2 4368.94,4046.02 4408.68,4006.28 D7.2@4408.68,4002.34 ; 4546.91,3864.11 4582.46,3864.11 *.B1 *.B1@4598.43,3838.43
  Top Layer w35: D2.2 D3.2 D1.2 TP4.1@2952.4,3927.6 ; TP4.1 R3.1@3135,3925 ; J4.1 3276.89,4171.89 3654.81,4171.89 3664.81,4161.89 4020.82,4161.89 4036.67,4161.89 4225,3973.55 4225,3720 4265.31,3679.69 4439.69,3679.69 *.B1@4598.43,3838.43 ; D7.2@4408.68,4002.34 4546.91,3864.11
  Bottom Layer w15: Reader.1 4293.83,1551.17 4348.83,1551.17 4400,1500 5295,1500 5341.17,1546.17 5341.17,3283.47 4776.49,3848.15 *.B1
ADC0_DM0/ADC1_DM3: U1.28
ADC0_DM1: U1.24
ADC0_DP0/AD1_DP3: U1.27
ADC0_DP1: U1.23
ADC0_SE16: U1.36
ADC1_DM0/ADC0_DM3: U1.30
ADC1_DM1: U1.26
ADC1_DP0/ADC0_DP3: U1.29
ADC1_DP1: U1.25
ADC1_SE16: U1.35
ADC1_SE18: U1.37
CLOCK: R25.2 Reader.3 | length 447.6
  Top Layer w15: Reader.3 4020,1930 4097.5,2007.5 4099.5,2007.5 4120,2028 R25.2
COM: *.C1 J9.3 | length 659.2
  Top Layer w15: *.C1 *.C1@4502.93,4047.93
  Top Layer w25: J9.3 4680,4323.15 4680,4165 4562.93,4047.93 *.C1@4502.93,4047.93
CRS_DV: R12.1 U3.15 | length 163.9
  Top Layer w12: U3.15 3474.84,3275.16 R12.1
DAC0_OUT: U1.38
DAC1_OUT: U1.39
DATA: R26.2 Reader.4 | length 220.7
  Top Layer w15: Reader.4 3920,1795 3932.5,1807.5 3934.5,1807.5 3955,1828 R26.2
DC_EXT: D3.1 J3.1 TP2.1 | length 1020.9
  Top Layer w19.68: D3.1 2744.84,4027.99 2752.72,4035.87 2752.72,4045.71 ; TP2.1@3280,4540 TP2.1 ; TP2.1@3310,4540 TP2.1@3315,4535
  Top Layer w35: 2752.72,4045.71 2857.01,4150 3115,4150 3285,4320 TP2.1 ; J3.1 TP2.1@3280,4540
DC_JACK: D2.1 J2.1 TP1.1 | length 580.1
  Top Layer w19.68: D2.1 2625,4064 ; J2.1 TP1.1@3090,4255
  Top Layer w35: 2625,4064 J2.1
ENABLE: R24.2 Reader.2 | length 205
  Top Layer w15: Reader.2 R24.2
ENET1_CT: C14.2 J6.3 J6.6 R16.1 | length 1101
  Top Layer w15: R16.1 2260,2693 2280.5,2672.5 2282.5,2672.5 2325,2630 2325,2440 2440,2325 2664.45,2325 J6.3 ; J6.6 2949.81,2560.37 2949.81,2579.81 C14.2
  Bottom Layer w15: J6.3 2782.13,2400.75 2882.13,2500.75 J6.6
ENET1_RX+: J6.7 R17.2 U3.4 | length 1649
  Top Layer w12: v1(3110,3280) 3110.78,3280.78 3149.11,3280.78 3153.05,3276.84 3154.9,3276.84 3156.58,3275.16 U3.4
  Top Layer w15: J6.7 3099.87,2400.75 3252.62,2553.5 3415.59,2553.5 3436.59,2574.5 3449.5,2574.5 R17.2
  Bottom Layer w12: J6.7 2982.33,2400.75 3033.06,2451.48 3033.06,3087.81 3110,3164.75 v1(3110,3280)
ENET1_RX-: J6.8 R20.2 U3.3 | length 1183.2
  Top Layer w12: v1(3085,3305) 3125,3305 3131.22,3298.78 3156.57,3298.78 3160.51,3294.84 U3.3
  Top Layer w15: J6.8@2990.2,2504.4 J6.8 3100.75,2500.75 3172.5,2572.5 3172.5,2574.5 3193,2595 R20.2
  Bottom Layer w15: J6.8 2990.2,3210.2 v1(3085,3305)
ENET1_TX+: J6.1 R14.2 U3.6 | length 1569
  Top Layer w12: 2356.5,2846.5 2735,3225 3140.25,3225 3144.52,3229.27 3163.28,3229.27 3169.8,3235.79 U3.6
  Top Layer w15: 2356.5,2846.5 2356.5,2638.5 2377.5,2617.5 2377.5,2615.5 2398,2595 2402,2595 2422.5,2574.5 2422.5,2572.5 2594.25,2400.75 J6.1
ENET1_TX-: J6.2 R15.2 U3.5 | length 1116.9
  Top Layer w12: v1(3140.47,3255.47) U3.5
  Top Layer w15: J6.2 2690.2,2589.8 R15.2 2682,2600 2702.5,2620.5 2702.5,2622.5 2835,2755 v1(3065,2755)
  Bottom Layer w12: v1(3065,2755) 3140.47,2830.47 v1(3140.47,3255.47)
ENET_1_RX_RDIV: C15.2 R17.1 R20.1 | length 314.4
  Top Layer w15: R20.1 R17.1 3400.5,2615.5 3417.71,2615.5 3426.5,2624.29 3426.5,2628.59 3434.41,2636.5 3505.59,2636.5 3513.5,2628.59 3513.5,2624.29 3522.29,2615.5 3539.5,2615.5 C15.2
EXTAL32_RTC: U1.41 Y2.2 | length 327.9
  Top Layer w12: 4478.84,3306.98 U1.41
  Top Layer w15: Y2.2 4439,3439.94 4439,3344.96 4476.98,3306.98 4478.84,3306.98
I2S0_TX_BCLK: R26.1 R27.2 U1.97 | length 1078
  Top Layer w15: R26.1 3800,1920 R27.2 3795,2075 3915,2195 4194.09,2195 4383.55,2384.46 4385.41,2384.46 U1.97
I2S0_TX_FS: R25.1 R28.2 U1.98 | length 580.4
  Top Layer w12: 4161.71,2132.92 U1.98
  Top Layer w15: R28.2 R25.1 4132.92,2132.92 4161.71,2132.92
K64_MICRO_USB_DN: R1.2 U1.20 | length 1920.4
  Top Layer w10: R1.2 3740,4328 3763,4305 3770,4305 v1(3795,4280) ; v1(4830,3075) 4853.24,3075 U1.20
  Bottom Layer w10: v1(3795,4280) 3953.84,4280 3958.84,4275 4035,4275 4630,3680 4630,3275 v1(4830,3075)
K64_MICRO_USB_DP: R2.2 U1.19 | length 2051.6
  Top Layer w10: R2.2 3673,4307 3673,4301.14 3675,4299.14 3675,4282.67 3685,4272.67 v1(3685,4270) ; v1(4805.39,3050) 4852.15,3050 4876.58,3074.43 4880.51,3074.43 U1.19
  Bottom Layer w10: v1(3685,4270) 3727.39,4227.61 3885.28,4227.61 3887.67,4230 4025,4230 4600,3655 4600,3255.39 v1(4805.39,3050)
LED1/SPEED: R22.1 U3.23 | length 1105.9
  Top Layer w15: R22.1 v1(2870,2665) ; v1(3215.29,3385) 3215.29,3384.71 3215.47,3384.53 U3.23
  Bottom Layer w15: v1@2870,2663.01 v1(2870,2665) 2870,2993.13 2928.44,3051.57 2928.44,3338.44 2985,3395 3202.95,3395 3212.95,3385 v1(3215.29,3385)
NC: *.NC1 J9.2 | length 438.1
  Top Layer w25: J9.2@4675,4515 4948.15,4241.85 *.NC1
Net*_B2: *.B2 D7.1 T1.2 | length 616.6
  Top Layer w15: T1.2 4292.72,3897.4 4288.41,3901.71 4288.41,4158.41 4321.32,4191.32 4321.32,4195.26 4367.91,4241.85 *.B2
NetC1_1: C1.1 J4.2 R3.2 U2.3 | length 446.3
  Top Layer w15: R3.2 R3.2@3235,3925
  Top Layer w35: R3.2 J4.2 3314.02,4109.02 U2.3 ; R3.2@3235,3925 C1.1
NetC4_2: C4.2 D5.1 R7.2 U3.24 | length 425.9
  Top Layer w12: R7.2 3171.41,3540 3178.44,3532.97 3178.44,3523.72 3190.16,3512.01 D5.1 ; U3.24 3195.79,3360.2 3192.84,3363.15 3192.03,3363.15 3185,3370.18 3185,3500.29 3196.72,3512.01 D5.1 ; C4.2 3228.59,3540 3221.56,3532.97 3221.56,3523.72 3209.84,3512.01 D5.1
NetC13_2: C13.2 R14.1 R15.1 | length 311
  Top Layer w15: R15.1 2495,2600 R14.1 C13.2 ; C13.2 2489.15,2775.85 2489.15,2788.28 2490,2789.12 C13.2
NetD4_2: D4.2 J5.1 R4.1 | length 296
  Top Layer w15: J5.1@3942.6,4072.4 J5.1
  Top Layer w35: D4.2 J5.1@3942.6,4072.4 ; R4.1 J5.1
NetD6_1: D6.1 R13.2 | length 88.9
  Top Layer w15: R13.2 3570.49,1618.35 D6.1
NetD6_3: D6.3 R19.1 | length 86.6
  Top Layer w15: R19.1 3632.93,1738.9 D6.3
NetD6_4: D6.4 R18.1 | length 218.9
  Top Layer w15: R18.1 3480,1828.84 3551.37,1757.46 3557.28,1757.46 3571.43,1743.31 D6.4
NetJ6_10: J6.10 R21.2 | length 562
  Top Layer w15: J6.10 3138.82,2410 R21.2
NetJ6_11: J6.11 R22.2 | length 433.9
  Top Layer w15: J6.11 2781.26,2366.61 2781.26,2434.69 2749.14,2466.81 2749.14,2517.76 2780,2548.62 R22.2
NetR30_1: R30.1 T1.1 | length 91.2
  Top Layer w15: R30.1 4400,3790 T1.1
NO: *.NA1 J9.1 | length 822.7
  Top Layer w25: J9.1 4900.53,4496.32 4948.68,4496.32 5095,4350 5095,3943.15 *.NA1
P3V3_VREG: C2.1 D4.1 TP5.1 U2.2 U2.4 | length 682.1
  Top Layer w15: TP5.1@3705.98,3860.98 TP5.1 ; D4.1@3837.01,3980 D4.1
  Top Layer w35: U2.2 U2.4 TP5.1@3705.98,3860.98 ; TP5.1 C2.1 D4.1@3837.01,3980
P5V0_USB_CONN_VBUS: C19.1 D1.1 J1.1 U1.22 | length 3279.3
  Top Layer w15: J1.1 3736.55,4521.48 3736.55,4493.45 ; v1@3805.69,4456.64 3810,4452.33 v1(3810,4450) ; v1@4790,3315 4804.29,3300.71 4847.29,3300.71 C19.1 4850,3245 4890,3205 4890,3170 4885,3165
  Top Layer w20: 3736.55,4493.45 3750.19,4479.81 3765.19,4479.81 3775,4470 3794.81,4470 3805.69,4459.12 v1@3805.69,4456.64 ; v1(3810,4450) 3860,4400 3860,4370
  Top Layer w35: D1.1 2850,4065 2890,4105 3152.02,4105 3259.9,4212.89 3832.89,4212.89 3860,4240 3860,4370
  Bottom Layer w15: v1(3810,4450) 3966.5,4293.5 4042.66,4293.5 4791.11,3545.05 v1(4791.11,3313.43)
PTA0: P1.4 U1.50 | length 668.4
  Top Layer w15: P1.4 4007.09,3555 4156.5,3405.59 4156.5,3316.41 4254.26,3218.65 4316.23,3218.65 4383.54,3151.34 U1.50
PTA1: U1.51
PTA2: R5.2 U1.52 | length 300.6
  Top Layer w12: 4284.2,3195 U1.52@4355.7,3123.5
  Top Layer w13: U1.52@4355.7,3123.5 U1.52
  Top Layer w15: R5.2@4118.2,3274.8 4165.2,3274.8 4245,3195 4284.2,3195
PTA3: P1.2 U1.53 | length 846.4
  Top Layer w12: 4315.42,3135.94 U1.53@4341.78,3109.58
  Top Layer w13: U1.53@4341.78,3109.58 U1.53
  Top Layer w15: P1.2 3891.97,3611.97 3891.97,3537.18 3917.18,3511.97 3948.33,3511.97 4065,3395.3 4065,3252.91 4087.91,3230 4180.3,3230 4236.3,3174 4277.36,3174 4315.42,3135.94
PTA4: U1.54
PTA5: R10.1 U1.55 | length 905
  Top Layer w15: R10.1 3670,3455 3813.03,3311.97 3963.03,3311.97 4066,3209 4171,3209 4227,3153 4244.94,3153 4287.98,3109.96 4287.98,3108.5 4314.34,3082.14 U1.55
PTA6: U1.58
PTA7: U1.59
PTA8: U1.60
PTA9: U1.61
PTA10: U1.62
PTA11: U1.63
PTA12: R9.1 U1.64 | length 576.2
  Top Layer w12: R9.1 4135.53,3010 U1.64
PTA13: R8.1 U1.65 | length 618
  Top Layer w10: v1(4064.16,2986.19) 4067.3,2986.19 4073.11,2992 4125.69,2992 U1.65
  Top Layer w12: R8.1 3637,3100 3659,3078 3659,3076 3707,3028 4007.58,3028 4013.39,3033.81 v1(4016.53,3033.81)
  Bottom Layer w10: v1@4061.09,2986.19 v1(4064.16,2986.19)
  Bottom Layer w12: v1(4016.53,3033.81) 4016.53,3030.74 v1@4061.09,2986.19
PTA14: R12.2 U1.66 | length 732.6
  Top Layer w10: v1(4115.83,2968.19) 4118.44,2965.58 4124.27,2965.58 U1.66
  Top Layer w12: R12.2 v1(3630,3270)
  Bottom Layer w12: v1(3630,3270) 3761.27,3270 3973.65,3057.62 4026.4,3057.62 v1(4115.83,2968.19)
PTA15: U1.67 U3.19 | length 1115.6
  Top Layer w10: U3.19 3294.21,3384.21 v1(3345,3435) ; v1(4085,2960) 4100.62,2944.38 4115.25,2944.38 4124.18,2935.45 4126.56,2935.45 U1.67
  Bottom Layer w10: v1(3345,3435) 3432.74,3435 3620.55,3247.19 3760.04,3247.19 4024.42,2982.81 4035.27,2982.81 4054.71,2963.38 4072.33,2963.38 4073.1,2962.61 4082.39,2962.61 v1(4085,2960)
PTA16: U1.68 U3.20 | length 1133.6
  Top Layer w10: v1(4015,2960) 4052.74,2960 4084.36,2928.38 4105.75,2928.38 4133.34,2900.79 U1.68
  Top Layer w12: U3.20 3274.53,3399.53 3297.78,3422.78
  Bottom Layer w12: v1(3300,3435) 3302.22,3432.78 3313.55,3432.78 3335.14,3411.19 3432.51,3411.19 3613.51,3230.19 3753,3230.19 4012.78,2970.41 4012.78,2962.22 v1(4015,2960)
PTA17: U1.69 U3.21 | length 1151.1
  Top Layer w10: U3.21 3255,3358.39 v1(3255,3410) ; v1(3990,2935) 4013.62,2911.38 4092.44,2911.38 4096.21,2907.61 U1.69@4098.72,2907.61
  Top Layer w12: U1.69@4098.72,2907.61 U1.69
  Bottom Layer w10: v1(3255,3410) 3269.73,3424.73 3278.01,3424.73 3290.55,3412.19 3310.1,3412.19 3328.1,3394.19 3425.47,3394.19 3627.16,3192.5 3742.5,3192.5 3987.39,2947.61 3987.39,2937.61 v1(3990,2935)
PTA18: R11.1 U1.72 | length 799.8
  Top Layer w15: R11.1 3572,3360 3592.5,3339.5 3592.5,3337.5 3665,3265 3665,3160 v1(3770,3055) ; v1(3811.19,2986.19) 3812.84,2984.54 3820.46,2984.54 3932.86,2872.14 4050.68,2872.14 U1.72
  Bottom Layer w15: v1(3770,3055) 3770,3027.38 v1(3811.19,2986.19)
PTA19: U1.73
PTA24: U1.75
PTA25: U1.76
PTA26: U1.77
PTA27: U1.78
PTA28: U1.79
PTA29: U1.80
PTB0: U1.81 U3.10 | length 1207.4
  Top Layer w11: U3.10@3255,3203.44 3255,3178.25 3256.16,3177.09
  Top Layer w15: 3256.16,3177.09 3256.16,3175.93 3824.92,2607.17 4162.31,2607.17 4188.67,2633.53 U1.81
PTB1: U1.82 U3.11 | length 1211.4
  Top Layer w12: U3.11 3274.53,3188.42 3277.16,3185.79 3277.16,3184.63 v1@3280.9,3180.9 ; v1(4155,2580) 4163.37,2580 U1.82
  Bottom Layer w12: v1(3290,3180) 3890,2580 v1(4155,2580)
PTB2: U1.83
PTB3: U1.84
PTB4: U1.85
PTB5: U1.86
PTB6: U1.87
PTB7: U1.88
PTB8: U1.89
PTB9: U1.90
PTB10: U1.91
PTB11: U1.92
PTB16: U1.95
PTB17: U1.96
PTB20: U1.99
PTB21: R19.2 U1.100 | length 1787.6
  Top Layer w12: 4370,2285.53 U1.100
  Top Layer w15: R19.2 3632.93,1911.35 3653.43,1890.85 3655.43,1890.85 3735,1811.28 3735,1585 3760,1560 4245,1560 4370,1685 4370,2285.53
PTB22: R13.1 U1.101 | length 1694.7
  Top Layer w12: 4395,2282.69 U1.101
  Top Layer w15: R13.1 4268.35,1528.35 4395,1655 4395,2282.69
PTB23: U1.102
PTC0: OV6760.16 U1.103 | length 820.6
  Top Layer w12: U1.103 4474.55,2306.56 4472.03,2306.56 4442,2276.53 4442,1757.54 4491.53,1708.02 4491.53,1633.47 OV6760.16
PTC1: OV6760.15 U1.104 | length 696.1
  Top Layer w12: U1.104 4460,2264.18 4460,1765 OV6760.15
PTC2: OV6760.14 U1.105 | length 811.1
  Top Layer w12: U1.105 4482,2258.34 4482,1817.54 4591.53,1708.02 4591.53,1633.47 OV6760.14
PTC3: OV6760.13 U1.106 | length 658.6
  Top Layer w12: U1.106@4516.17,2264.8 4500,2248.63 4500,1825 OV6760.13
PTC4: OV6760.12 U1.109 | length 717.9
  Top Layer w15: U1.109 4700,2222.82 4700,1625 OV6760.12
PTC5: OV6760.11 U1.110 | length 626
  Top Layer w12: U1.110 4750,2200.66
  Top Layer w15: OV6760.11 4750,2200.66
PTC6: OV6760.10 U1.111 | length 776.5
  Top Layer w12: U1.111 4769.5,2209 4771,2209
  Top Layer w15: 4771,2209 4795,2185 4795,1630 OV6760.10
PTC7: OV6760.9 U1.112 | length 685.9
  Top Layer w12: U1.112 4727.61,2278.72 4727.61,2276.34 4775.45,2228.5 4779.08,2228.5 4850,2157.58 OV6760.9
PTC8: U1.113
PTC9: R24.1 R29.2 U1.114 | length 891.5
  Top Layer w12: U1.114 4775,2287.01 v1(4775,2285)
  Top Layer w15: R24.1 v1(4340,1920)
  Bottom Layer w15: v1(4340,1920) 4455,1920 4775,2240 v1(4775,2285)
PTC10: U1.115
PTC11: U1.116
PTC12: U1.117
PTC13: U1.118
PTC14: U1.119
PTC15: U1.120
PTC16: U1.123
PTC17: U1.124
PTC18: U1.125
PTC19: U1.126
PTD0: OV6760.8 U1.127 | length 977.7
  Top Layer w12: U1.127 4945,2478.92 4945,2140 4908.47,2103.47 4908.47,1657.8 4950,1616.27 OV6760.8
PTD1: OV6760.5 U1.128 | length 887.1
  Top Layer w12: U1.128 4970,2481.76 v1@4970,2480
  Bottom Layer w12: v1@4970,2470 4970,1755 OV6760.5
  other v1: 4970,2475
PTD2: OV6760.7 U1.129 | length 901.1
  Top Layer w12: U1.129 4995,2484.6 4995,1720 OV6760.7
PTD3: OV6760.6 U1.130 | length 1018.8
  Top Layer w12: U1.130 5015,2492.44 5015,1698.73 5008.47,1692.2 5008.47,1657.8 5050,1616.27 OV6760.6
PTD4: U1.131
PTD5: U1.132
PTD6: U1.133
PTD7: U1.136
PTD8: U1.137
PTD9: U1.138
PTD10: U1.139
PTD11: U1.140
PTD12: U1.141
PTD13: U1.142
PTD14: U1.143
PTD15: U1.144
PTE0: U1.1
PTE1: U1.2
PTE2: U1.3
PTE3: U1.4
PTE4: U1.7
PTE5: U1.8
PTE6: U1.9
PTE7: U1.10
PTE8: U1.11
PTE9: U1.12
PTE10: U1.13
PTE11: U1.14
PTE12: U1.15
PTE24: OV6760.3 U1.45 | length 1843.5
  Top Layer w12: U1.45 4479.9,3194.57 4495.43,3194.57 v1(4505,3185)
  Bottom Layer w12: v1(4505,3185) 5150,2540 OV6760.3
PTE25: OV6760.4 U1.46 | length 1922.1
  Top Layer w12: U1.46 4475,3171.63 v1@4475,3170
  Bottom Layer w12: v1(4480,3165) 5105,2540 5105,1615 5145,1575 OV6760.4
PTE26: R18.2 R30.2 U1.47 | length 2406.9
  Top Layer w15: R18.2 3483.71,2008.71 3483.71,2048.71 3980,2545 v1(4160,2545) ; R30.2 4296.91,3775 4317.41,3754.5 4317.41,3737.59 v1(4340,3715) ; U1.47 4425.7,3192.7 4454.69,3163.71 4454.69,3154.52 4455,3154.2 v1(4455,3145)
  Bottom Layer w15: v1(4160,2545) 4455,2840 v1(4455,3145) 4454.69,3145.31 4454.69,3176.11 4450,3180.8 4450,3605 v1(4340,3715)
PTE27: U1.48
PTE28: U1.49
REXT: C3.2 R6.2 U3.9 | length 362.4
  Top Layer w15: U3.9 3235.16,3009.84 3247.5,2997.5 3249.5,2997.5 3270,2977 C3.2 R6.2@3380,2975
RMII0_RXD_0: R8.2 U3.13 | length 284.2
  Top Layer w12: U3.13 3320.2,3235.79 3321.68,3234.32 3321.68,3232.34 3454.02,3100 R8.2
RMII0_RXD_1: R9.2 U3.12 | length 337.9
  Top Layer w12: U3.12 3294.21,3209.46 3313.81,3189.86 3313.81,3186.19 3490,3010 R9.2
RMII0_RXER: R10.2 U3.17 | length 224.9
  Top Layer w12: U3.17 3349.53,3314.53 3451,3416 3451,3433 3473,3455 R10.2
RMII_XTALI: C11.2 U3.8 Y1.2 | length 366.9
  Top Layer w11: Y1.2@3084.42,3078.36 3113.36,3078.36 3215,3180 3215,3211.3 U3.8
  Top Layer w15: C11.2 3075,3068.94 Y1.2 Y1.2@3084.42,3078.36
RMII_XTALO: C12.2 U3.7 Y1.1 | length 522.2
  Top Layer w11: Y1.1 3010,3070 3151.77,3211.77 U3.7
  Top Layer w15: C12.2 2880,3066.06 Y1.1
RST_TGTMCU_B: C20.2 P1.10 R23.1 U1.74 | length 886.8
  Top Layer w12: v1(3835,2730) 3886,2679 3888,2679 3910,2657 C20.2 3998.42,2655 R23.1@4000,2656.58 ; v1(3835,3055) 3835,3155 P1.10
  Top Layer w15: R23.1@4000,2656.58 4020.5,2677.08 4037.74,2677.08 U1.74
  Bottom Layer w12: v1(3835,2730) v1(3835,3055)
RXCLK: R11.2 U3.16 | length 188.8
  Top Layer w12: U3.16 3379.84,3294.84 3439.03,3354.03 3474.03,3354.03 R11.2
TC_USB_ID_TP: J1.4 TP3.1 | length 195.9
  Top Layer w19.68: TP3.1@3497.54,4477.46 3646.29,4477.46 3657.54,4488.71 J1.4@3657.54,4519.98
TRACE_SWO: P1.6 R5.1 | length 236.9
  Top Layer w15: v1(4055,3460) 4101.29,3413.71 4101.29,3383.71 R5.1
  Bottom Layer w15: P1.6 4047.67,3455 4052.67,3460 v1(4055,3460)
USB_CONN_DN: J1.2 R1.1 | length 114
  Top Layer w19: 3710.59,4451.41 J1.2
  Top Layer w19.68: 3710.59,4451.41 3740,4422 R1.1
USB_CONN_DP: J1.3 R2.1 | length 117.5
  Top Layer w19: 3685,4455 J1.3
  Top Layer w19.68: R2.1 3650,4422 3668.16,4440.16 3670.16,4440.16 3685,4455
VDDPLL_1.2V: C9.2 C10.2 U3.1 | length 306
  Top Layer w12: C9.2 C10.2 3000,3282 3022,3304 3024,3304 3056.19,3336.19 3096.72,3336.19 3109.34,3348.81 3149.86,3348.81 3160.7,3337.97 U3.1@3166.85,3337.97
VOUT33_K64: C16.2 TP7.1 U1.21 | length 409.8
  Top Layer w15: U1.21 4940,3189.6 C16.2 4940,3257 4960.5,3277.5 4962.5,3277.5 5060,3375 TP7.1
VSS: C1.2 C2.2 C3.1 C4.1 C5.1 C6.1 C7.1 C8.1 C9.1 C10.1 C11.1 C12.1 C13.1 C14.1 C15.1 C16.1 C17.1 C18.1 C19.2 C20.1 C21.1 C22.1 C23.1 C24.1 C25.1 C26.1 C27.1 C28.1 C29.1 J1.5 J1.6 J1.7 J1.8 J1.9 J1.10 J1.11 J2.2 J2.3 J3.2 J6.9 OV6760.2 OV6760.18 P1.3 P1.5 pad.0 R6.1 R27.1 R28.1 R29.1 Reader.5 T1.3 U1.6 U1.17 U1.18 U1.33 U1.34 U1.44 U1.57 U1.71 U1.93 U1.107 U1.121 U1.134 U2.1 U3.22 U3.25 | length 1959.9
  Top Layer w15: J2.2@2796.88,4468.1 J2.2 ; C14.1@3039.5,2579.5 C14.1 ; J6.9 J6.9@3077.66,2243.27 ; v3(3227.94,3302.06) 3235,3309.12 3235,3345 ; C1.2 3330,4013 3350.5,3992.5 C1.2@3352.5,3992.5 ; J1.7 J1.5 ; U2.1@3613.3,4106.77 U2.1 3680.98,4109.02 3697.5,4092.5 3699.5,4092.5 3720,4072 C2.2
  Top Layer w19.68: J1.11@3560.68,4622 3639.48,4622 J1.10 J1.9 J1.8 3822.8,4619.45 3822.8,4601.41
  Bottom Layer w15: J2.3 2658.08,4396.23 2725.01,4396.23 J2.2 2851.25,4491.22 2900.03,4540 J3.2 3153.15,4628.15 J1.11 3547.2,4561.22 J1.7 ; J1.6 3822.8,4561.22 J1.8 ; v1(4610,2345) 4610,2342.67 4615,2337.67 v1(4615,2260)
  other v3: 3227.94,3267.94 3262.06,3267.94 3262.06,3302.06
XTAL32_RTC: U1.40 Y2.1 | length 273.1
  Top Layer w12: 4495.93,3319.59 4495.93,3317.73 U1.40
  Top Layer w15: 4495.93,3319.59 4495,3320.52 4495,3493.94 Y2.1
pads on no net: J6. J6.4 J6.5 P1.7 P1.8 P1.9 U3.18

## Polygon pours and split planes (outlines as drawn)
VSS on Bottom Layer "VSS_L02_P001" (solid, pour order 1): 2195,4685 5405,4685 5405,1420 2195,1420
VSS on Top Layer "VSS_L01_P000" (solid, pour order 0): 2195,4685 5405,4685 5405,1420 2195,1420

## Text inside footprints (layer, text, board x,y; h text height)
J1: Mechanical 1 "PCB EDGE" at 3968.46,4689.17 h11.81 r180
P1: Top Overlay "2" at 3915,3755 h50 r270; Top Overlay "1" at 3815,3735 h50 r270; Top Overlay "9" at 3815,3195 h50 r270; Top Overlay "10" at 3915,3195 h50 r270